# EAGLE board 2led (EAGLE 6.1)
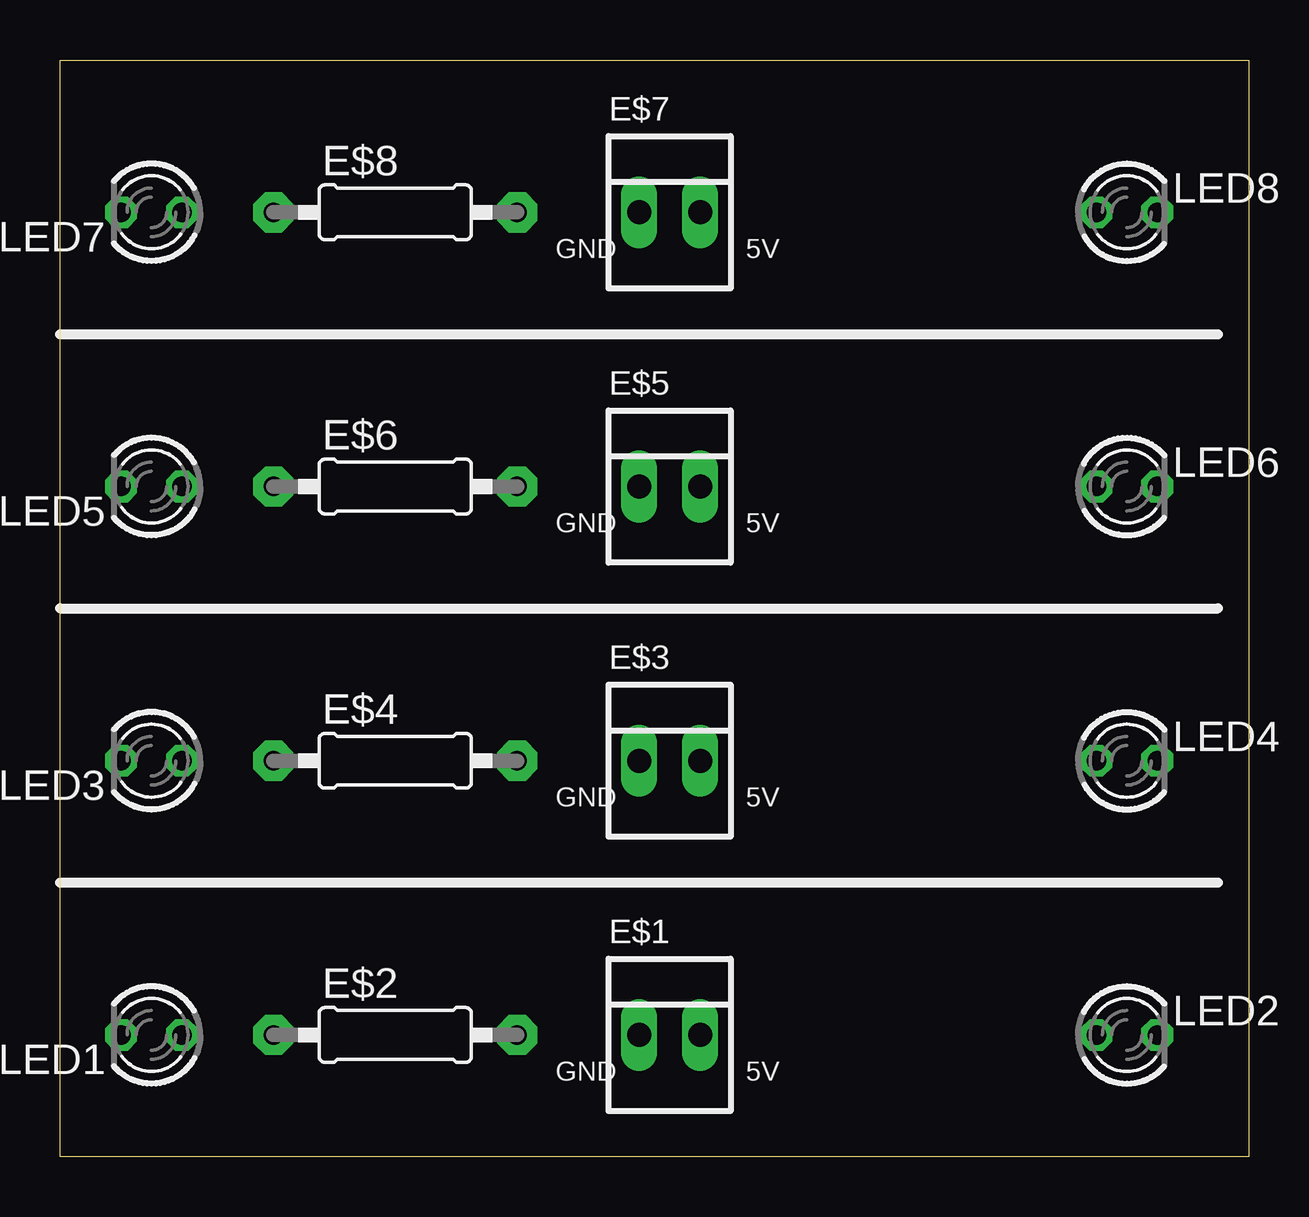
[diagram p0: board, top side]
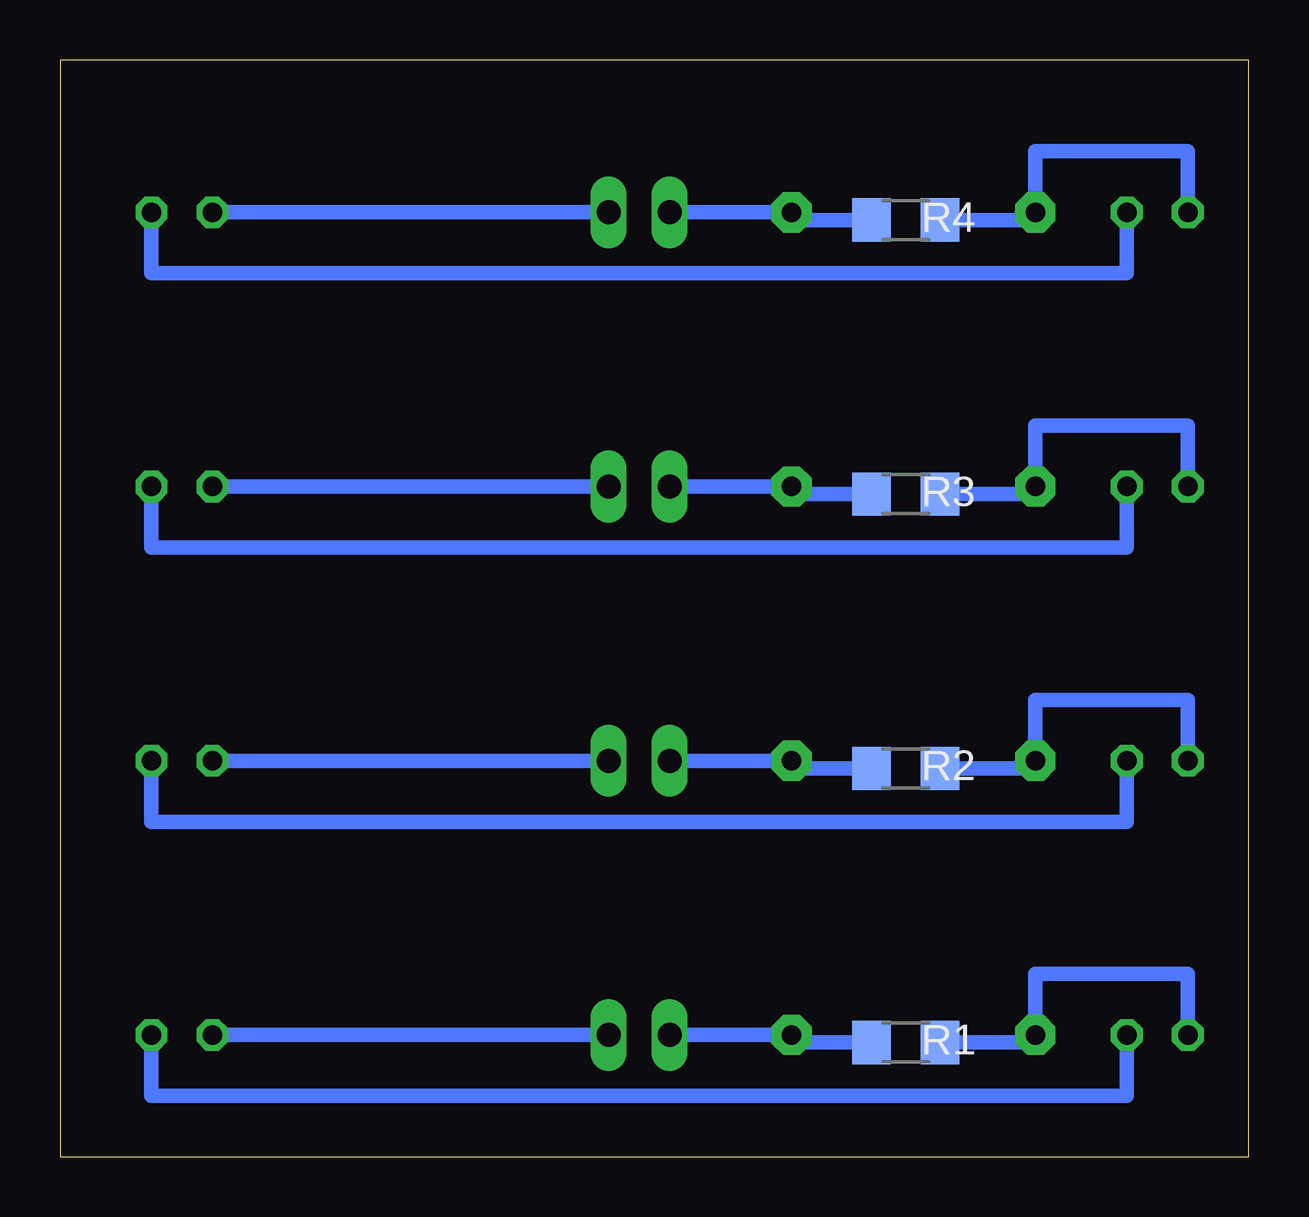
[diagram p1: board, bottom side, seen from below]

Size 49.53 x 45.72 mm. Coordinates in mm from the lower left corner, seen from the top.
Outline: 0,0 0,45.72 49.53,45.72 49.53,0 0,0
Copper layers (1*16): Top 0.035mm / dielectric 1.5mm / Bottom 0.035mm
Design rules: minimum track width 10mil, minimum drill 24mil, track to track 8mil, track to pad 8mil, pad to pad 8mil, via to via 8mil, smd to smd 8mil, copper to edge 40mil, drill to drill 8mil, minimum pad ring 10mil, minimum via ring 8mil, stop-mask expansion 4mil, vias tented up to drill 0mil, thermal gap 10mil
Net classes: 0 default: width 0.457 mm; 1 power: width 0.914 mm

## Footprints (pad centres in the part's own frame; a part is rotated, then mirrored left to right if it is on the bottom)
22-23-2021 = drill 1 long: 1 -1.27,0; 2 1.27,0
0207/10 = drill 0.813 pad 1.676 octagon: 1 -5.08,0; 2 5.08,0
LED3MM = drill 0.813 octagon: A -1.27,0; K 1.27,0
R1206 = smd 1.6 x 1.803: 1 -1.422,0; 2 1.422,0

## Placement (x,y rotation side)
E$1  [22-23-2021]  25.4,5.08 0 top
E$2  [0207/10]  13.97,5.08 0 top
E$3  [22-23-2021]  25.4,16.51 0 top
E$4  [0207/10]  13.97,16.51 0 top
E$5  [22-23-2021]  25.4,27.94 0 top
E$6  [0207/10]  13.97,27.94 0 top
E$7  [22-23-2021]  25.4,39.37 0 top
E$8  [0207/10]  13.97,39.37 0 top
LED1  [LED3MM]  3.81,5.08 180 top
LED2  [LED3MM]  44.45,5.08 0 top
LED3  [LED3MM]  3.81,16.51 180 top
LED4  [LED3MM]  44.45,16.51 0 top
LED5  [LED3MM]  3.81,27.94 180 top
LED6  [LED3MM]  44.45,27.94 0 top
LED7  [LED3MM]  3.81,39.37 180 top
LED8  [LED3MM]  44.45,39.37 0 top
R1  1K  [R1206]  14.29,4.76 0 bottom
R2  1K  [R1206]  14.29,16.19 0 bottom
R3  1K  [R1206]  14.29,27.62 0 bottom
R4  1K  [R1206]  14.29,39.05 0 bottom

## Library data of the parts
E$1 E$3 E$5 E$7 = con-molex
E$2 E$4 E$6 E$8 = adafruit
LED1-LED8 = led
R1-R4 = smd-ipc

## Nets
S$1 [power]: E$1.1 E$2.2 R1.1
S$2 [power]: E$3.1 E$4.2 R2.1
S$3: LED1.A LED2.K
S$4: E$2.1 LED1.K R1.2
S$5 [power]: E$1.2 LED2.A
S$6 [power]: E$3.2 LED4.A
S$7: E$4.1 LED3.K R2.2
S$8: LED3.A LED4.K
S$9 [power]: E$5.1 E$6.2 R3.1
S$10 [power]: E$5.2 LED6.A
S$11: E$6.1 LED5.K R3.2
S$12: LED5.A LED6.K
S$13 [power]: E$7.1 E$8.2 R4.1
S$14 [power]: E$7.2 LED8.A
S$15: E$8.1 LED7.K R4.2
S$16: LED7.A LED8.K

## Tracks (layer width: path | path; a pad name or v marks a point on that pad's centre or on a via)
S$1
  Bottom 0.61: E$1.1 E$2.2 19.05,4.76 R1.1
S$2
  Bottom 0.61: E$3.1 E$4.2 19.05,16.19 R2.1
S$3
  Bottom 0.61: LED1.A 5.08,2.54 45.72,2.54 LED2.K
S$4
  Bottom 0.61: LED1.K 2.54,7.62 8.89,7.62 E$2.1 8.89,4.76 R1.2
S$5
  Bottom 0.61: LED2.A E$1.2
S$6
  Bottom 0.61: LED4.A E$3.2
S$7
  Bottom 0.61: LED3.K 2.54,19.05 8.89,19.05 E$4.1 8.89,16.19 R2.2
S$8
  Bottom 0.61: LED3.A 5.08,13.97 45.72,13.97 LED4.K
S$9
  Bottom 0.61: E$5.1 E$6.2 19.05,27.62 R3.1
S$10
  Bottom 0.61: LED6.A E$5.2
S$11
  Bottom 0.61: LED5.K 2.54,30.48 8.89,30.48 E$6.1 8.89,27.62 R3.2
S$12
  Bottom 0.61: LED5.A 5.08,25.4 45.72,25.4 LED6.K
S$13
  Bottom 0.61: E$7.1 E$8.2 19.05,39.05 R4.1
S$14
  Bottom 0.61: LED8.A E$7.2
S$15
  Bottom 0.61: LED7.K 2.54,41.91 8.89,41.91 E$8.1 8.89,39.05 R4.2
S$16
  Bottom 0.61: LED7.A 5.08,36.83 45.72,36.83 LED8.K

## Text on the board
tPlace: GND | 5V | GND | 5V | GND | 5V | GND | 5V